# EAGLE board Qwiic Twist-MiddleJig (EAGLE 9.2.1)
REVISION: A

Size 43.18 x 38.1 mm. Coordinates in mm from the lower left corner, seen from the top.
Outline: 0,35.56 arc-80 2.54,38.1 40.64,38.1 arc-80 43.18,35.56 43.18,2.54 arc-80 40.64,0 2.54,0 arc-80 0,2.54 0,35.56
Outline: 5.08,27.94 26.67,27.94 26.67,24.13 33.02,24.13 33.02,26.67 38.1,26.67 38.1,8.89 38.1,8.13 29.21,8.13 29.21,8.89 5.08,8.89 5.08,27.94
Copper layers (1*16): Top 0.035mm / dielectric 1.5mm / Bottom 0.035mm
Design rules "SparkFun-2-layer-PCBWay-LIMIT": minimum track width 6mil, minimum drill 0.3mm, track to track 6mil, track to pad 6mil, pad to pad 6mil, via to via 6mil, smd to smd 6mil, copper to edge 6mil, drill to drill 6mil, minimum pad ring 6mil, minimum via ring 6mil, stop-mask expansion 4mil, vias tented up to drill 25mil, thermal gap 10mil
Net classes: 1 3.3V: width 0.152 mm
Holes 1.7 mm at 28.7,7.62 26.16,7.62 23.62,7.62 21.08,7.62 18.54,7.62 31.12,30.48 28.58,30.48 31.12,27.94 28.58,27.94 31.12,25.4 28.58,25.4 16,7.62

## Footprints (pad centres in the part's own frame; a part is rotated, then mirrored left to right if it is on the bottom)
STAND-OFF-TIGHT = hole 3.048: 0,0
NUBBIN_LOCKER = hole 2.794: 0,0
STAND-OFF = hole 3.302: 0,0

## Placement (x,y rotation side)
E$1  [STAND-OFF-TIGHT]  3.17,6.35 0 top
E$2  [STAND-OFF-TIGHT]  3.17,31.75 0 top
E$3  [STAND-OFF-TIGHT]  40.01,6.35 0 top
E$4  [STAND-OFF-TIGHT]  40.01,31.75 0 top
E$5  [NUBBIN_LOCKER]  21.59,2.03 0 top
E$6  [NUBBIN_LOCKER]  21.59,36.07 0 top
FRAME1  FRAME-LETTER  [CREATIVE_COMMONS]  119.38,-11.43 0 bottom  (outside the outline)
JP3  STAND-OFF  [STAND-OFF]  34.29,29.21 0 bottom
LOGO1  OSHW-LOGOMINI  [OSHW-LOGO-MINI]  12.06,8.25 0 top
U$3  [GND1]  27.94,8 90 top
U$4  [3#3V2]  25.4,8 90 top
U$5  [SDA8]  22.86,8 90 top
U$6  [SCL9]  20.32,8 90 top
U$7  [RST#-[>]  15.24,7.87 90 bottom
U$9  [INT#-[<]  17.78,7.87 90 bottom
U$11  [INT#-[<]  17.78,7.87 90 top
U$14  [QWIIC_TWIST1]  30.1,29.34 0 bottom
U$16  [RST#-[>]  15.24,7.87 90 top
U$21  [3#3V2]  25.4,8 90 bottom
U$22  [GND1]  27.94,8 90 bottom
U$26  [SCL9]  20.32,8 90 bottom
U$27  [SDA8]  22.86,8 90 bottom

## Library data of the parts
E$1-E$6 = SparkFun-Hardware
FRAME1 LOGO1 = SparkFun-Aesthetics
JP3 = SparkFun
U$3-U$6 U$21 U$22 U$26 U$27 = Labels-0_04
U$7 U$9 U$11 U$16 = Labels
U$14 = buzzard_labels (54)

## Text on the board
Top: Up-MiddleLayer
Bottom: Down-MiddleLayer
Dimension: Route Out
tPlace: #680 | Qwiic Twist | DEV-15083